# Allegro board MAINBOARD_02_20181023.brd
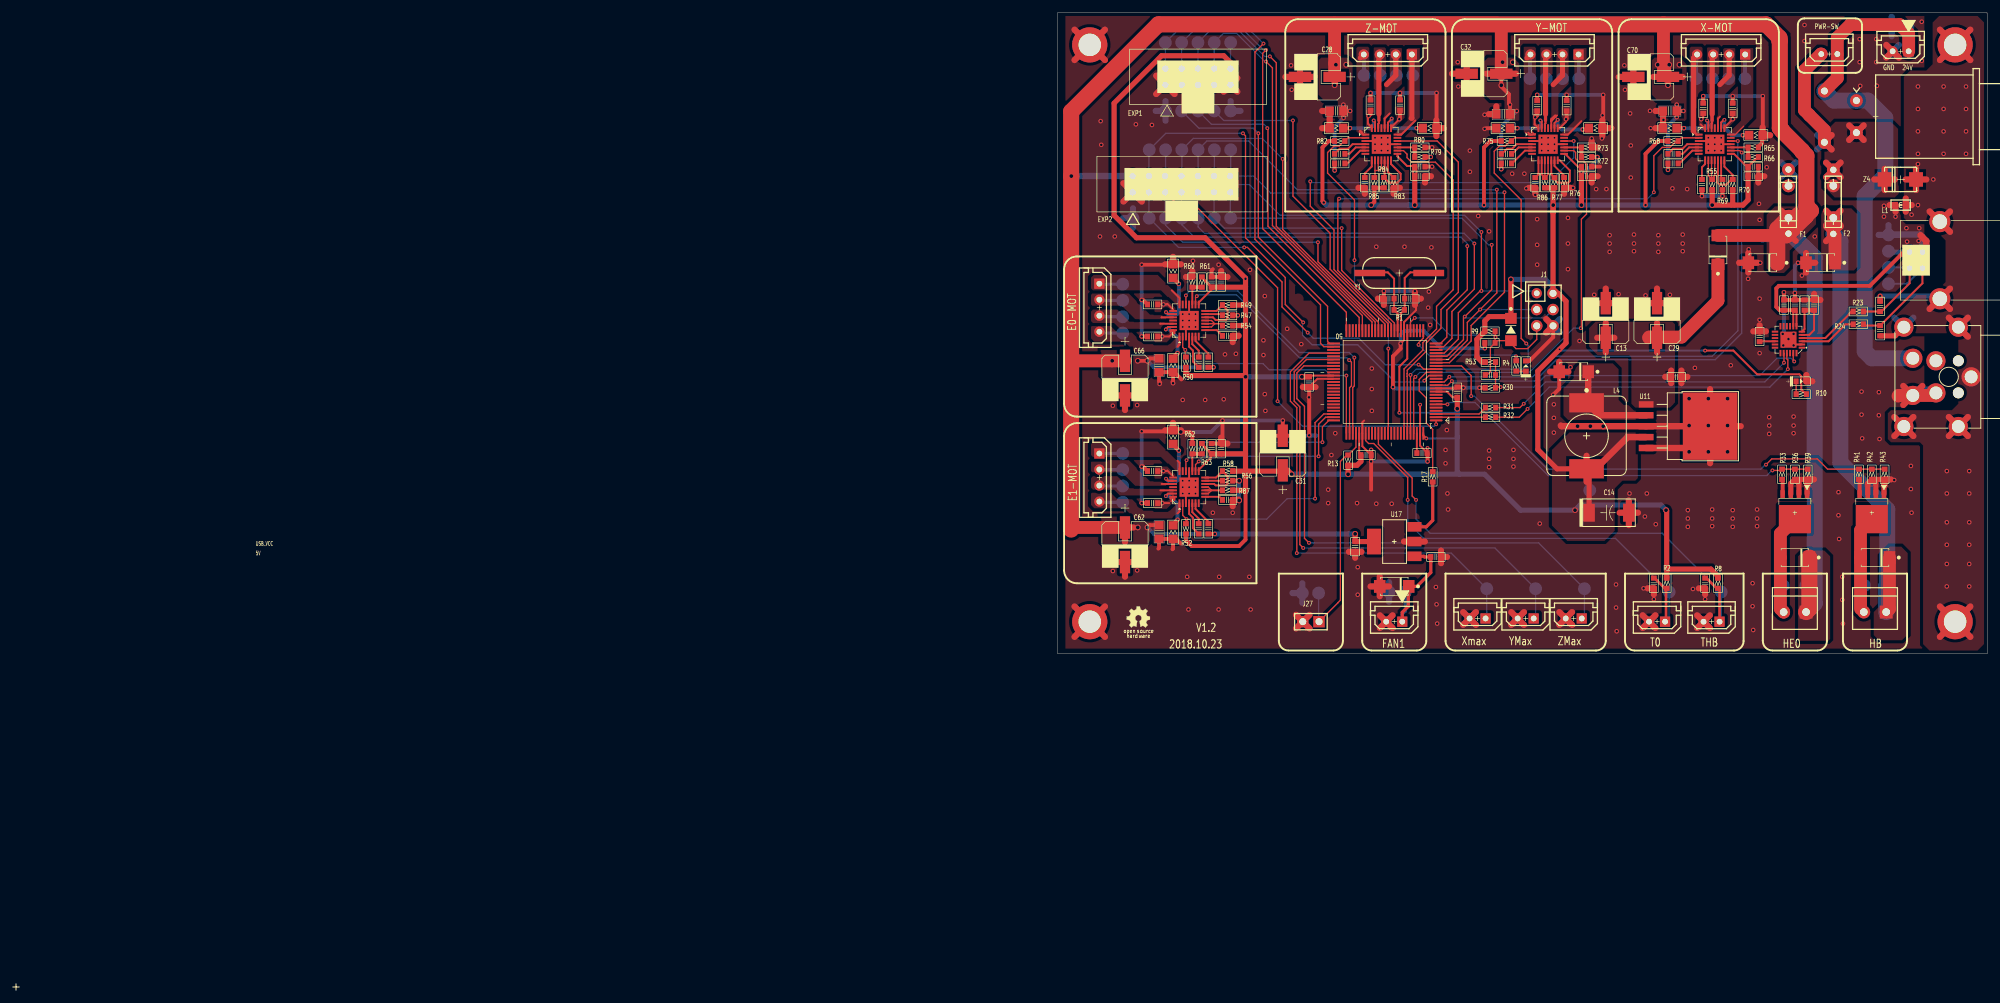
[diagram p0: board, top side]
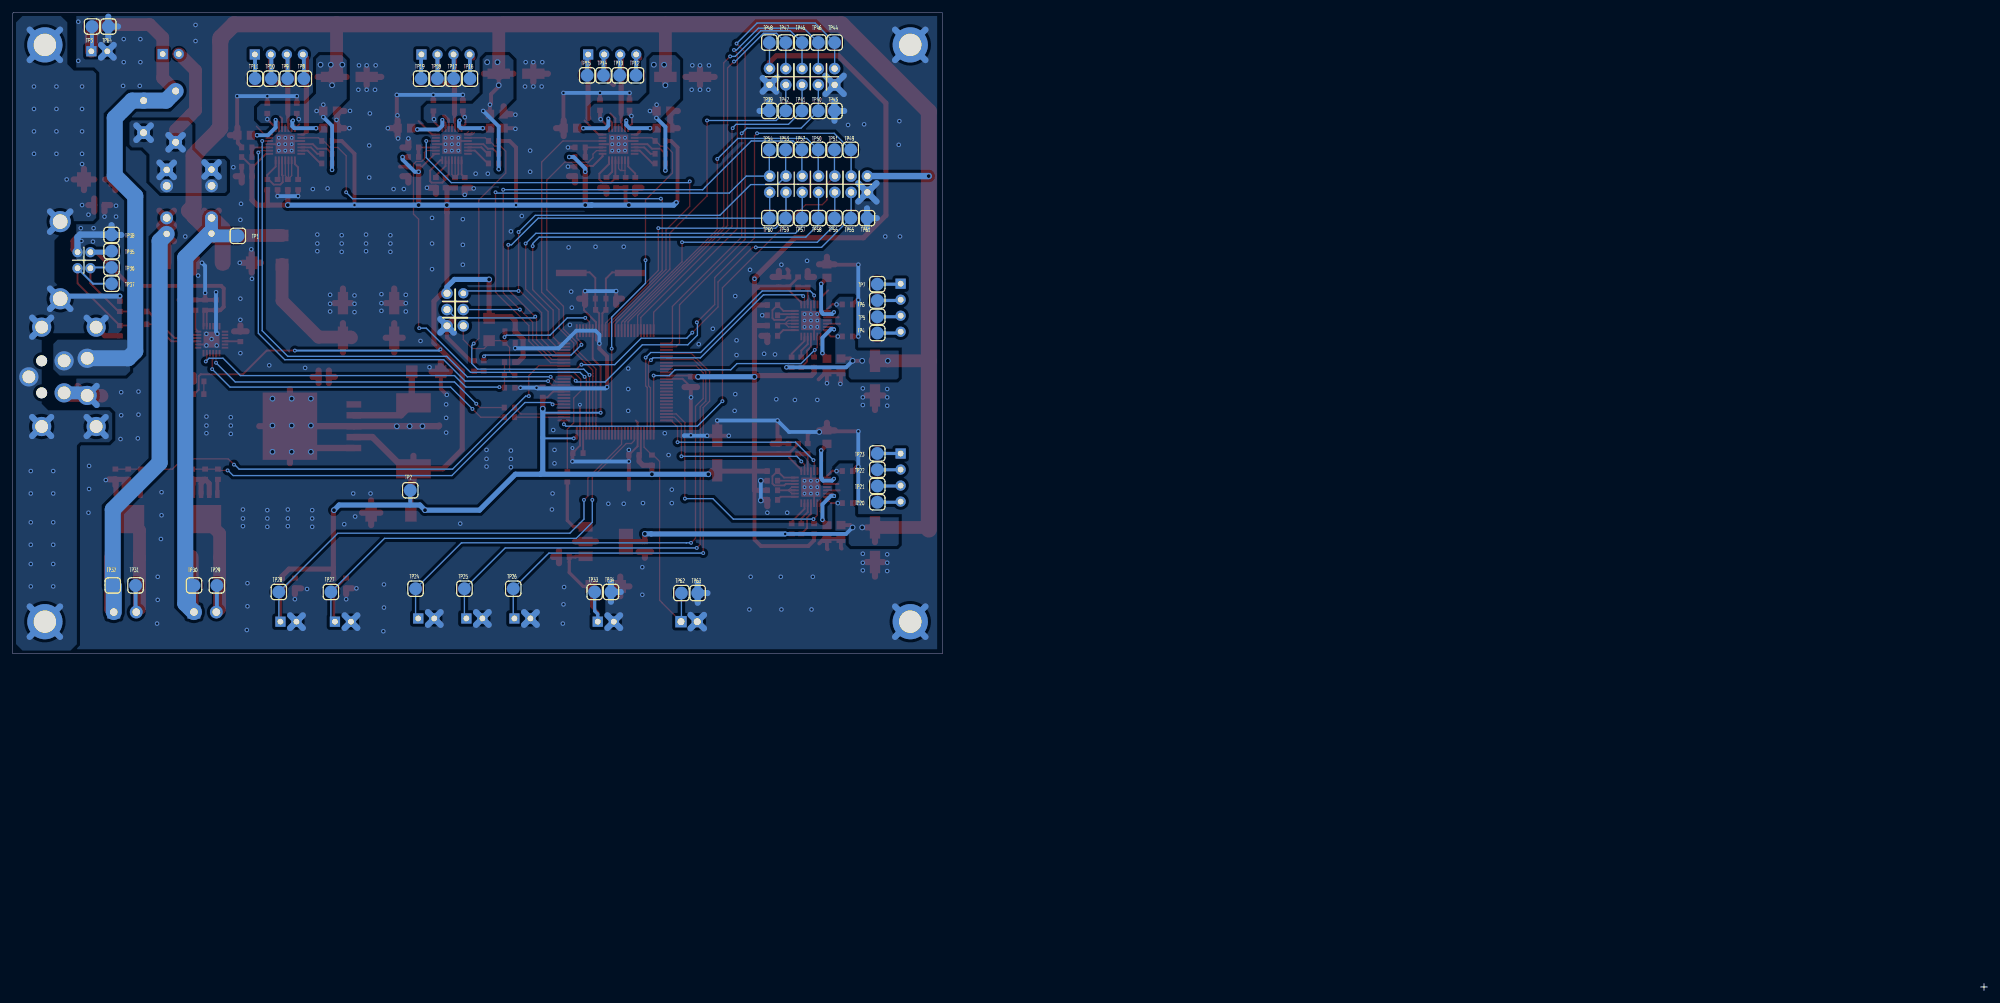
[diagram p1: board, bottom side, seen from below]

Outline 308 x 152.5 mm; copper layers: TOP, BOTTOM. Coordinates in mm from the lower left corner of the outline.
Outline path: 0,0.5 0.5,0.5 ; 0.5,0.5 0.5,1 ; 0.5,0.5 0.5,0 ; 0.5,0.5 1,0.5 ; 308,152.5 163,152.5 163,52.5 308,52.5 308,152.4 307.9,152.5

## Design rules (mm)
constraint set DEFAULT: 

## Placement (name value [footprint] x y rotation side)
BC1  100nF  [CCHIP1608]  225.33 93.3 90 top
BC2  100nF  [CCHIP1608]  219.83 83.8 0 top
BC3  100nF  [CCHIP1608]  202.23 94.9 270 top
BC4  100nF  [CCHIP1608]  211.1 83.5 0 top
BC6  100nF  [CCHIP1608]  259.5 95.7 0 top
BC11  100nF  [CCHIP1608]  187 110.49 90 top
BC12  100nF  [CCHIP1608]  187 84.49 90 top
BC13  100nF  [CCHIP1608]  271.5 128.5 0 top
BC14  100nF  [CCHIP1608]  245.5 128.5 0 top
BC15  100nF  [CCHIP1608]  219.5 128.5 0 top
C1  18pF  [CCHIP1608]  217.93 107.9 0 top
C2  18pF  [CCHIP1608]  214.68 107.9 180 top
C3  1uF  [CCHIP1608]  256 63.5 270 top
C6  1uF  [CCHIP1608]  264 63.5 270 top
C7  18pF  [CCHIP1608]  230.43 101 180 top
C8  220nF  [CCHIP1608]  209.4 69.2 270 top
C9  1uF  [CCHIP1608]  276.3 106.9 90 top
C10  1uF  [CCHIP1608]  272.5 102 90 top
C11  1nF  [CCHIP1608]  222 67.6 0 top
C12  1uF  [CCHIP1608]  230.5 96 180 top
C13  100uF/35V  [SAMYOUNG-F60]  248.5 104.5 270 top
C14  330uF/10V (Tantal E case)  [TCHIP7343]  249 74.5 0 top
C15  100nF  [CCHIP1608]  278 106.9 90 top
C19  100nF  [CCHIP1608]  281 106.9 90 top
C21  100nF  [CCHIP1608]  279.5 106.9 90 top
C28  100uF/35V/AL  [SAMYOUNG-F60]  203.5 142.5 0 top
C29  100uF/35V/AL  [SAMYOUNG-F60]  256.5 104.5 270 top
C31  220uF/6.34V/AL  [SAMYOUNG-F60]  198.11 83.81 270 top
C32  100uF/35V/AL  [SAMYOUNG-F60]  229.5 143 0 top
C33  100nF  [CCHIP1608]  185 97.99 270 top
C34  1uF  [CCHIP1608]  188.5 110.49 90 top
C35  100nF  [CCHIP1608]  186.5 97.99 90 top
C36  1uF  [CCHIP1608]  188.5 84.49 90 top
C37  100nF  [CCHIP1608]  186.5 71.99 90 top
C38  220nF  [CCHIP1608]  189.5 102.1 0 top
C39  100nF  [CCHIP1608]  185 71.99 270 top
C40  220nF  [CCHIP1608]  189.5 76.5 0 top
C41  1uF  [CCHIP1608]  271.5 127 0 top
C42  100nF  [CCHIP1608]  259 129 0 top
C43  100nF  [CCHIP1608]  259 130.5 180 top
C44  220nF  [CCHIP1608]  263.5 125.7 270 top
C45  1uF  [CCHIP1608]  245.5 127 0 top
C46  100nF  [CCHIP1608]  233 129 0 top
C47  100nF  [CCHIP1608]  233 130.5 180 top
C48  220nF  [CCHIP1608]  237.5 126 270 top
C49  1uF  [CCHIP1608]  219.5 127 0 top
C50  100nF  [CCHIP1608]  207 129 0 top
C51  100nF  [CCHIP1608]  207 130.5 180 top
C52  220nF  [CCHIP1608]  210.9 126 270 top
C53  4.7uF  [CCHIP2012]  206.5 136.5 180 top
C54  0.1uF  [CCHIP1608]  211.8 138.1 90 top
C55  0.1uF  [CCHIP1608]  216.4 138.1 90 top
C56  4.7uF  [CCHIP2012]  232.5 136 180 top
C57  0.1uF  [CCHIP1608]  237.8 138 90 top
C58  0.1uF  [CCHIP1608]  242.4 138 90 top
C59  4.7uF  [CCHIP2012]  179.5 71.5 270 top
C60  0.1uF  [CCHIP1608]  177.8 81 180 top
C61  0.1uF  [CCHIP1608]  177.8 76 180 top
C62  100uF/35V/AL  [SAMYOUNG-F60]  173.5 69.5 90 top
C63  4.7uF/2012  [CCHIP2012]  179.5 97.5 270 top
C64  0.1uF  [CCHIP1608]  177.8 102 180 top
C65  0.1uF  [CCHIP1608]  177.8 107 180 top
C66  100uF/35V/AL  [SAMYOUNG-F60]  173.5 95.5 90 top
C67  4.7uF  [CCHIP2012]  258.5 136.5 180 top
C68  0.1uF  [CCHIP1608]  263.7 137.6 90 top
C69  0.1uF  [CCHIP1608]  268.3 137.6 90 top
C70  100uF/35V/AL  [SAMYOUNG-F60]  255.5 142.5 0 top
CN2  5267-02P  [5267-02]  256.5 57.5 180 top
CN3  -  [5267-04]  169.5 106.49 270 top
CN4  -  [5267-04]  169.5 79.99 270 top
CN6  5267-02P  [5267-02]  265 57.5 180 top
CN7  -  [5267-04]  266.5 146 180 top
CN8  -  [5267-04]  240.5 146 180 top
CN9  -  [5267-04]  214.5 146 180 top
CN11  5267-02P  [5267-02]  243.5 58 180 top
CN12  5267-02P  [5267-02]  236 58 180 top
CN13  5267-02P  [5267-02]  228.5 58 180 top
CN16  5267-02P  [5267-02]  283.37 146.07 180 top
CN17  BR350  [TERMINAL_350P_2P_BR350C]  278 59 180 top
CN18  5267-02P  [5267-02]  215.5 57.5 180 top
CN19  BR350  [TERMINAL_350P_2P_BR350C]  290.5 59 180 top
D1  SS34  [LL5819]  266 115.5 270 top
D2  SS34  [LL5819]  273 113.5 0 top
D3  B560C-13-F  [LL5819]  243.5 96.5 0 top
D4  SS34  [LL5819]  282 113.5 0 top
D6  LL4148  [PHM_1N4935]  233.7 103.1 90 top
D9  SS34  [LL5819]  215.5 63 0 top
D10  SS34  [LL5819]  278 67.5 0 top
D12  SS34  [LL5819]  290.5 67.5 0 top
EXP1  HEADER_2x5_B  [HEADER2X5_B]  179.8 141.26 0 top
EXP2  HEADER_2x7_B  [HEADER2X7_B]  174.69 124.48 0 top
F1  JUMPER  [FUSE050]  277 123 270 top
F2  JUMPER  [FUSE050]  284 123 270 top
F3  JUMPER  [FUSE100]  277 123.05 270 top
F4  JUMPER  [FUSE100]  284 123 270 top
J1  HEADER_2x3_M  [HEADER2X3]  239 106.2 0 top
J25  Rocker_SW_KCD1-104 ANGLE  [SW_KCD1-104-1]  290.6 136.3 270 top
J26  HEADER 2  [5267-02]  294.5 146.5 180 top
J27  HEADER 2  [HEADER1X2]  202.5 57.5 180 top
JR1  2MJ-3432-007  [DIN4PS_2MJ-3432-007]  311 95.7 270 top
L1  FB  [L1608]  294.5 122.5 180 top
L4  47uH/ MSS1210-473ME  [L_123X60H_220UH]  245.5 86.5 270 top
LED1  LEDG-SMD  [LED1608]  236.03 97.4 90 top
LED2  LEDG-SMD  [LED1608]  279 95 0 top
NOREF  -  []  308 52.5 90 top
NOREF#2  -  []  163 152.5 0 top
NOREF#3  -  []  168 57.5 0 top
NOREF#4  -  []  303 147.5 90 top
NOREF#5  -  []  303 147.5 0 top
NOREF#6  -  []  308 113.9 90 top
NOREF#7  -  []  308 95.7 90 top
NOREF#8  -  []  308 62.5 90 top
NOREF#9  -  []  168 57.5 90 top
NOREF#10  -  []  174.79 59.16 0 top
NOREF#11  -  []  294.5 113.9 0 top
PAD5  TP2  [HOLE350X550]  303 147.5 0 top
PAD6  TP2  [HOLE350X550]  168 147.5 0 top
PAD7  TP2  [HOLE350X550]  303 57.5 0 top
PAD8  TP2  [HOLE350X550]  168 57.5 0 top
Q3  PSMN7R0-60YS  [SOT669]  278 74.5 180 top
Q5  PSMN7R0-60YS  [SOT669]  290 74.5 180 top
R1  1M  [RCHIP1608]  216.28 106.15 180 top
R2  4.7k  [RCHIP1608]  258 63.5 90 top
R4  1k  [RCHIP1608]  234.53 97.4 90 top
R8  4.7k  [RCHIP1608]  266 63.5 90 top
R9  10k  [RCHIP1608]  230.43 102.8 180 top
R10  1k  [RCHIP1608]  279 93 0 top
R13  10k  [RCHIP1608]  208.3 82.7 270 top
R17  1k  [RCHIP1608]  221.5 80.1 90 top
R23  22  [RCHIP1608]  287.9 105.9 0 top
R24  22  [RCHIP1608]  287.9 103.9 0 top
R30  1k  [RCHIP1608]  230.5 94 180 top
R31  1k  [RCHIP1608]  230.53 90.9 180 top
R32  1k  [RCHIP1608]  230.53 89.4 180 top
R33  22  [RCHIP1608]  276 80.5 90 top
R36  NM-1k  [RCHIP1608]  278 80.5 90 top
R39  100k  [RCHIP1608]  280 80.5 90 top
R41  22  [RCHIP1608]  288 80.5 90 top
R42  NM-1k  [RCHIP1608]  290 80.5 90 top
R43  100k  [RCHIP1608]  292 80.5 90 top
R47  10k  [RCHIP1608]  189.5 105.3 180 top
R48  0.2/2012  [RCHIP2012]  181 112.19 270 top
R49  10k  [RCHIP1608]  189.5 106.9 180 top
R50  10k  [RCHIP1608]  183 97.99 270 top
R51  0.2/2012  [RCHIP2012]  181 97.49 90 top
R52  10k  [RCHIP1608]  183 71.99 270 top
R53  NM-1k  [RCHIP1608]  230.5 98 0 top
R54  10k  [RCHIP1608]  189.5 103.7 0 top
R55  10k  [RCHIP1608]  265.1 125.7 270 top
R56  10k  [RCHIP1608]  189.5 79.49 180 top
R57  0.2/2012  [RCHIP2012]  181 86.29 270 top
R58  10k  [RCHIP1608]  189.5 80.99 180 top
R59  0.2/2012  [RCHIP2012]  181 71.49 90 top
R60  680  [RCHIP1608]  184 110.49 270 top
R61  10k  [RCHIP1608]  185.5 110.49 90 top
R62  680  [RCHIP1608]  184 84.49 270 top
R63  10k  [RCHIP1608]  185.5 84.49 90 top
R64  0.2/2012  [RCHIP2012]  271.9 133.4 180 top
R65  3K 1%  [RCHIP1608]  271.5 131.5 180 top
R66  10k  [RCHIP1608]  271.5 130 0 top
R67  0.2/2012  [RCHIP2012]  258.5 134.5 0 top
R68  10k  [RCHIP1608]  259 132.5 180 top
R69  10k  [RCHIP1608]  266.7 125.7 90 top
R70  10k  [RCHIP1608]  268.3 125.7 90 top
R71  0.2/2012  [RCHIP2012]  246.9 134.5 180 top
R72  10k  [RCHIP1608]  245.5 130 0 top
R73  3K 1%  [RCHIP1608]  245.5 131.5 180 top
R74  0.2/2012  [RCHIP2012]  232.5 134.5 0 top
R75  10k  [RCHIP1608]  233 132.5 180 top
R76  10k  [RCHIP1608]  242 126 90 top
R77  100k  [RCHIP1608]  240.5 126 90 top
R78  0.2/2012  [RCHIP2012]  221 134.5 180 top
R79  10k  [RCHIP1608]  219.5 130 0 top
R80  3K 1%  [RCHIP1608]  219.5 131.5 180 top
R81  0.2/2012  [RCHIP2012]  206.5 134.5 0 top
R82  10k  [RCHIP1608]  207 132.5 180 top
R83  10k  [RCHIP1608]  215.4 126 90 top
R84  10k  [RCHIP1608]  213.9 126 90 top
R85  10k  [RCHIP1608]  212.4 126 270 top
R86  4.7k  [RCHIP1608]  239 126 270 top
R87  10k  [RCHIP1608]  189.5 78 0 top
TP1  SMD  [TP200]  272.9 117.7 180 bottom
TP2  SMD  [TP200]  246 78 180 bottom
TP3  SMD  [TP200]  295.65 150.36 180 bottom
TP4  SMD  [TP200]  173.14 102.54 180 bottom
TP5  SMD  [TP200]  173.14 105.08 180 bottom
TP6  SMD  [TP200]  173.14 107.62 180 bottom
TP7  SMD  [TP200]  173.14 110.16 180 bottom
TP8  SMD  [TP200]  262.6 142.23 180 bottom
TP9  SMD  [TP200]  265.14 142.23 180 bottom
TP10  SMD  [TP200]  267.68 142.23 180 bottom
TP11  SMD  [TP200]  270.22 142.23 180 bottom
TP12  SMD  [TP200]  210.78 142.74 180 bottom
TP13  SMD  [TP200]  213.32 142.74 180 bottom
TP14  SMD  [TP200]  215.86 142.74 180 bottom
TP15  SMD  [TP200]  218.4 142.74 180 bottom
TP16  SMD  [TP200]  236.69 142.23 180 bottom
TP17  SMD  [TP200]  239.23 142.23 180 bottom
TP18  SMD  [TP200]  241.77 142.23 180 bottom
TP19  SMD  [TP200]  244.31 142.23 180 bottom
TP20  SMD  [TP200]  173.14 76.13 180 bottom
TP21  SMD  [TP200]  173.14 78.67 180 bottom
TP22  SMD  [TP200]  173.14 81.21 180 bottom
TP23  SMD  [TP200]  173.14 83.75 180 bottom
TP24  SMD  [TP200]  245.17 62.64 180 bottom
TP25  SMD  [TP200]  237.55 62.64 180 bottom
TP26  SMD  [TP200]  229.93 62.64 180 bottom
TP27  SMD  [TP200]  258.38 62.14 180 bottom
TP28  SMD  [TP200]  266.51 62.14 180 bottom
TP29  SMD  [TP200]  276.17 63.15 180 bottom
TP30  SMD  [TP200]  279.72 63.15 180 bottom
TP31  SMD  [TP200]  288.85 63.15 180 bottom
TP32  SMD  [TP200]  292.41 63.15 180 bottom
TP33  SMD  [TP200]  217.23 62.14 180 bottom
TP34  SMD  [TP200]  214.69 62.14 180 bottom
TP35  SMD  [TP200]  292.6 115.31 180 bottom
TP36  SMD  [TP200]  292.6 112.77 180 bottom
TP37  SMD  [TP200]  292.6 110.23 180 bottom
TP38  SMD  [TP200]  292.6 117.85 180 bottom
TP39  SMD  [TP200]  189.98 137.19 180 bottom
TP40  SMD  [TP200]  182.34 137.19 180 bottom
TP41  SMD  [TP200]  184.9 137.19 180 bottom
TP42  SMD  [TP200]  187.42 137.19 180 bottom
TP43  SMD  [TP200]  179.82 137.19 180 bottom
TP44  SMD  [TP200]  179.8 147.86 180 bottom
TP45  SMD  [TP200]  184.88 147.86 180 bottom
TP46  SMD  [TP200]  182.34 147.86 180 bottom
TP47  SMD  [TP200]  187.42 147.86 180 bottom
TP48  SMD  [TP200]  189.98 147.86 180 bottom
TP49  SMD  [TP200]  177.28 131.13 90 bottom
TP50  SMD  [TP200]  182.36 131.13 90 bottom
TP51  SMD  [TP200]  179.82 131.13 90 bottom
TP52  SMD  [TP200]  184.9 131.13 90 bottom
TP53  SMD  [TP200]  187.44 131.13 90 bottom
TP54  SMD  [TP200]  189.98 131.13 90 bottom
TP55  SMD  [TP200]  177.28 120.46 90 bottom
TP56  SMD  [TP200]  179.82 120.46 90 bottom
TP57  SMD  [TP200]  184.9 120.46 90 bottom
TP58  SMD  [TP200]  182.36 120.46 90 bottom
TP59  SMD  [TP200]  187.44 120.46 90 bottom
TP60  SMD  [TP200]  189.98 120.46 90 bottom
TP61  SMD  [TP200]  174.74 120.46 180 bottom
TP62  SMD  [TP200]  203.7 61.97 180 bottom
TP63  SMD  [TP200]  201.16 61.97 180 bottom
TP64  SMD  [TP200]  293.11 150.36 180 bottom
U1  CP2104  [QFN050_400_24P]  277 101.5 180 top
U2  ATMeag2560-16AU  [TQ100]  214.03 94.9 180 top
U7  USB_CON  [USBDEV_A]  296.9 113.9 270 top
U11  LM2596SX-5.0  [LM2576-D2PAK]  254 88 270 top
U12  A4988  [QFN050_500_28P]  183.5 104.49 90 top
U13  A4988  [QFN050_500_28P]  183.5 78.49 90 top
U14  A4988  [QFN050_500_28P]  265.5 132 0 top
U15  A4988  [QFN050_500_28P]  239.5 132 0 top
U16  A4988  [QFN050_500_28P]  213.5 132 0 top
U17  INF-ITS4200S-ME-X-SOT223-4  [SOT223]  215.5 70 90 top
Y1  16MHz_ATS_SMD  [XTALSMD2]  216.28 111.9 0 top
Z1  INR  [CCHIP1608]  291.3 106.7 270 top
Z2  INR  [CCHIP1608]  291.3 102.9 90 top
Z4  SMBJ24A_TVS  [DO-214AA]  294.5 126.5 0 top

## Library data of the parts
BC1-BC4 BC6 BC11-BC15 C1-C3 C6-C12 C15 C19 C21 C33-C52 C54 C55 C57 C58 C60 C61 C64 C65 C68 C69 = CAPACITOR NON-POL: Tolerance: TOL*; User Part Number: PAR*
C13 C14 C28 C29 C31 C32 C62 C66 C70 = C
C53 C56 C59 C63 C67 = CAPACITOR NON-POL: User Part Number: PAR*; Tolerance: TOL*
CN2 CN6 CN11-CN13 CN16-CN19 = CON2_0
CN3 CN4 CN7-CN9 = CON4_0
D1-D4 D9 D10 D12 = 1N1184A: Tolerance: TOL*; User Part Number: PAR*
D6 = 1N1184A: User Part Number: PAR*; Tolerance: TOL*
EXP1 = HEADER 5X2_0
EXP2 = HEADER 7X2
F1-F4 = JUMPER
J1 = HEADER 3X2
J25 = HEADER 2X2_1: User Part Number: PAR*; Tolerance: TOL*
J26 J27 = HEADER 2
JR1 = CONN CIR 5-R_1
L1 = l
L4 = l: Tolerance: TOL*; User Part Number: PAR*
LED1 LED2 = LED
PAD5-PAD8 = TP2_0
Q3 Q5 = IRF540N/TO_0: User Part Number: PAR*; Tolerance: TOL*
R1 R2 R4 R8-R10 R13 R17 R23 R24 R30-R33 R36 R39 R41-R43 R47 R49 R50 R52-R56 R58 R60-R63 R65 R66 R68-R70 R72 R73 R75-R77 R79 R80 R82-R87 = R_2: User Part Number: PAR*; Tolerance: TOL*
R48 R51 R57 R59 R64 R67 R71 R74 R78 R81 = R_2: Tolerance: TOL*; User Part Number: PAR*
TP1-TP64 = TEST POINT
U1 = CP2105_0
U2 = ATMeag2560a1_0: User Part Number: PAR*; Tolerance: TOL*
U7 = USB_CON: User Part Number: *
U11 = LM2575_0
U12-U16 = A4988
U17 = INF-ITS4200S-ME-X-SOT223-4
Y1 = CRYSTAL
Z1 Z2 = INR: Tolerance: TOL*; User Part Number: PAR*
Z4 = P6SMB9_0.1CA

## Footprints (pads in the part's own frame, mm; a bottom-side part is the same pattern mirrored in y, then rotated)
5267-02
  rect 1.6x1.6 hole 0.9: 1(-1.25,0)
  round 1.6 hole 0.9: 2(1.25,0)
5267-04
  rect 1.6x1.6 hole 0.9: 1(-3.75,0)
  round 1.6 hole 0.9: 2(-1.25,0) 3(1.25,0) 4(3.75,0)
CCHIP1608
  rect 0.8x0.9 smd: 1(-0.8,0) 2(0.8,0)
CCHIP2012
  rect 1.3x1.4 smd: 1(-1.067,-0.686) 2(1.067,-0.686)
DIN4PS_2MJ-3432-007
  round 1.7 hole 1.7 unplated: (-2.5,-7.5) (2.5,-7.5)
  round 3 hole 2: 1(2.9,-14.6) 2(-2.9,-14.6) 3(2.5,-11) 4(-2.5,-11) 5(0,-5.5) 6(7.75,-16) 7(-7.75,-16) 8(7.75,-7.5) 9(-7.75,-7.5)
DO-214AA
  rect 2.16x2.26 smd: 1(-2.5,0) 2(2.4,0)
FUSE050
  round 2 hole 1.2: 1(-2.5,0) 2(2.5,0)
FUSE100
  round 2 hole 1: 1(-5,0) 2(5,0)
HEADER1X2
  rect 1.778x1.778 hole 1.1: 1(-1.27,0)
  round 1.778 hole 1.1: 2(1.27,0)
HEADER2X3
  round 1.6 hole 0.9: 1(-1.27,2.54)
  round 1.8 hole 1.1: 2(1.27,2.54) 3(-1.27,0) 4(1.27,0) 5(-1.27,-2.54) 6(1.27,-2.54)
HEADER2X5_B
  rect 1.8x1.8 hole 1: 1(0,0)
  round 1.8 hole 1: 2(0,2.54) 3(2.54,0) 4(2.54,2.54) 5(5.08,0) 6(5.08,2.54) 7(7.62,0) 8(7.62,2.54) 9(10.16,0) 10(10.16,2.54)
HEADER2X7_B
  rect 1.8x1.8 hole 1: 1(0,0)
  round 1.8 hole 1: 2(0,2.54) 3(2.54,0) 4(2.54,2.54) 5(5.08,0) 6(5.08,2.54) 7(7.62,0) 8(7.62,2.54) 9(10.16,0) 10(10.16,2.54) 11(12.7,0) 12(12.7,2.54) 13(15.24,0) 14(15.24,2.54)
HOLE350X550
  round 5.5 hole 3.5: 1(0,0)
L1608
  rect 0.8x1 smd: 1(-0.8,0) 2(0.8,0)
L_123X60H_220UH
  rect 3x5.4 smd: 1(-5.15,0) 2(5.15,0)
LED1608
  rect 0.8x0.9 smd: 1(-0.813,0) 2(0.787,0)
LL5819
  rect 1.8x2 smd: 1(-2.261,0) 2(2.261,0)
LM2576-D2PAK
  rect 1x2.3 smd: 1(-3.404,0.8) 2(-1.702,0.8) 3(0,0.8) 4(1.702,0.8) 5(3.404,0.8)
  rect 10.5x8.5 smd: 6(0,10.775)
PHM_1N4935
  rect 1.702x1.803 smd: 1(-1.753,0) 2(1.727,0)
QFN050_400_24P
  rect 1x0.3 smd: 1(-2.1,1.25) 2(-2.1,0.75) 3(-2.1,0.25) 4(-2.1,-0.25) 5(-2.1,-0.75) 6(-2.1,-1.25) 13(2.1,-1.25) 14(2.1,-0.75) 15(2.1,-0.25) 16(2.1,0.25) 17(2.1,0.75) 18(2.1,1.25)
  rect 0.3x1 smd: 7(-1.25,-2.1) 8(-0.75,-2.1) 9(-0.25,-2.1) 10(0.25,-2.1) 11(0.75,-2.1) 12(1.25,-2.1) 19(1.25,2.1) 20(0.75,2.1) 21(0.25,2.1) 22(-0.25,2.1) 23(-0.75,2.1) 24(-1.25,2.1)
  rect 2.5x2.5 smd: 25(0,0)
QFN050_500_28P
  rect 1.2x0.3 smd: 1(-2.5,1.5) 2(-2.5,1) 3(-2.5,0.5) 4(-2.5,0) 5(-2.5,-0.5) 6(-2.5,-1) 7(-2.5,-1.5) 15(2.5,-1.5) 16(2.5,-1) 17(2.5,-0.5) 18(2.5,0) 19(2.5,0.5) 20(2.5,1) 21(2.5,1.5)
  rect 0.3x1.2 smd: 8(-1.5,-2.5) 9(-1,-2.5) 10(-0.5,-2.5) 11(0,-2.5) 12(0.5,-2.5) 13(1,-2.5) 14(1.5,-2.5) 22(1.5,2.5) 23(1,2.5) 24(0.5,2.5) 25(0,2.5) 26(-0.5,2.5) 27(-1,2.5) 28(-1.5,2.5)
  rect 3x3 smd: 29(0,0)
RCHIP1608
  rect 0.8x0.9 smd: 1(-0.8,0) 2(0.8,0)
RCHIP2012
  rect 1.3x1.4 smd: 1(-1.067,0) 2(1.041,0)
SAMYOUNG-F60
  rect 3.5x1.6 smd: 1(2.7,0) 2(-2.7,0)
SOT223
  rect 1.5x2.2 smd: 1(-2.3,-3.15) 2(0,-3.15) 3(2.3,-3.15)
  rect 4x2.2 smd: 4(0,3.15)
SOT669
  rect 0.7x1.2 smd: 1(-1.905,-2.9) 2(-0.635,-2.9) 3(0.635,-2.9) 4(1.905,-2.9)
  rect 5x4.4 smd: 5(0,1)
SW_KCD1-104-1
  round 2 hole 1.1: 1(-2.5,-3) 2(-4,-8) 3(4,-8) 4(2.5,-3)
TCHIP7343
  rect 1.8x2.8 smd: 1(-3.1,0) 2(3.1,0)
TERMINAL_350P_2P_BR350C
  rect 2x2 hole 1.2: 1(-1.75,0)
  round 2 hole 1.2: 2(1.75,0)
TP200
  round 2 smd: 1(0,0)
TQ100
  oval 2.007x0.305 smd: 1(-8,6)
  rect 2.007x0.305 smd: 2(-8,5.5) 3(-8,5) 4(-8,4.5) 5(-8,4) 6(-8,3.5) 7(-8,3) 8(-8,2.5) 9(-8,2) 10(-8,1.5) 11(-8,1) 12(-8,0.5) 13(-8,0) 14(-8,-0.5) 15(-8,-1) 16(-8,-1.5) 17(-8,-2) 18(-8,-2.5) 19(-8,-3) 20(-8,-3.5) 21(-8,-4) 22(-8,-4.5) 23(-8,-5) 24(-8,-5.5) 25(-8,-6) 51(8,-6) 52(8,-5.5) 53(8,-5) 54(8,-4.5) 55(8,-4) 56(8,-3.5) 57(8,-3) 58(8,-2.5) 59(8,-2) 60(8,-1.5) 61(8,-1) 62(8,-0.5) 63(8,0) 64(8,0.5) 65(8,1) 66(8,1.5) 67(8,2) 68(8,2.5) 69(8,3) 70(8,3.5) 71(8,4) 72(8,4.5) 73(8,5) 74(8,5.5) 75(8,6)
  rect 0.305x2.007 smd: 26(-6,-8) 27(-5.5,-8) 28(-5,-8) 29(-4.5,-8) 30(-4,-8) 31(-3.5,-8) 32(-3,-8) 33(-2.5,-8) 34(-2,-8) 35(-1.5,-8) 36(-1,-8) 37(-0.5,-8) 38(0,-8) 39(0.5,-8) 40(1,-8) 41(1.5,-8) 42(2,-8) 43(2.5,-8) 44(3,-8) 45(3.5,-8) 46(4,-8) 47(4.5,-8) 48(5,-8) 49(5.5,-8) 50(6,-8) 76(6,8) 77(5.5,8) 78(5,8) 79(4.5,8) 80(4,8) 81(3.5,8) 82(3,8) 83(2.5,8) 84(2,8) 85(1.5,8) 86(1,8) 87(0.5,8) 88(0,8) 89(-0.5,8) 90(-1,8) 91(-1.5,8) 92(-2,8) 93(-2.5,8) 94(-3,8) 95(-3.5,8) 96(-4,8) 97(-4.5,8) 98(-5,8) 99(-5.5,8) 100(-6,8)
USBDEV_A
  round 1.6 hole 0.9: 1(-1.25,-1) 2(1.25,-1) 3(1.25,1) 4(-1.25,1)
  round 3.302 hole 2.286: 5(-6.02,3.71) 6(6.02,3.71)
XTALSMD2
  rect 4.8x1 smd: 1(-4.6,0) 2(4.6,0)

## Nets
24V: C8.1 C28.1 C32.1 C35.1 C37.1 C42.1 C46.1 C50.1 C53.1 C54.1 C55.1 C56.1 C57.1 C58.1 C59.1 C60.1 C61.1 C62.1 C63.1 C64.1 C65.1 C66.1 C67.1 C68.1 C69.1 C70.1 CN17.1 D1.1 D2.2(C) D10.2(C) EXP2.2 F1.2(P2) F3.2(P2) TP1.1 TP30.1 U12.22 U12.28 U13.22 U13.28 U14.22 U14.28 U15.22 U15.28 U16.22 U16.28 U17.4(VS)
24V_IN: CN16.1 J25.1 J25.2 J26.1 JR1.2 JR1.4 TP3.1
24V_OUT: CN16.2 F1.1 F2.1 F3.1 F4.1 J25.3 J25.4 Z4.1
+5V: BC1.1 BC3.1 BC4.1 BC11.1 BC12.1 BC13.1 BC14.1 BC15.1 C14.1 C31.1 C34.1 C36.1 C41.1 C45.1 C49.1 D6.2(C) EXP1.10 J1.2 L4.2 R2.2 R8.2 R9.2 R10.2 R13.2 R49.1 R50.2 R52.2 R53.1 R54.2 R55.2 R58.1 R61.2 R63.2 R66.2 R68.2 R70.1 R72.2 R75.2 R77.1 R79.2 R82.2 R84.1 R85.2 R86.2 R87.2 TP2.1 TP48.1 U2.10 U2.31 U2.61 U2.80 U2.100 U11.4 U12.15 U13.15 U14.15 U15.15 U16.15
GND: BC1.2 BC2.2 BC3.2 BC4.2 BC6.2 BC11.2 BC12.2 BC13.2 BC14.2 BC15.2 C1.2 C2.2 C3.2 C6.2 C7.2 C8.2 C9.2 C10.2 C11.2 C13.2 C14.2 C15.2 C19.2 C21.2 C28.2 C29.2 C31.2 C32.2 C34.2 C36.2 C38.2 C40.2 C41.2 C44.2 C45.2 C48.2 C49.2 C52.2 C53.2 C54.2 C55.2 C56.2 C57.2 C58.2 C59.2 C60.2 C61.2 C62.2 C63.2 C64.2 C65.2 C66.2 C67.2 C68.2 C69.2 C70.2 CN2.2 CN6.2 CN11.2 CN12.2 CN13.2 CN18.2 D2.1 D3.1 D4.1 D9.1 EXP1.1 EXP1.9 EXP2.1 J1.6 J26.2 J27.2 JR1.1 JR1.3 L1.2 LED1.2(CATHODE) LED2.2(CATHODE) PAD6.1(A) PAD8.1(A) Q3.1 Q3.2 Q3.3(S3) Q5.1 Q5.2 Q5.3(S3) R30.2 R36.1 R39.1 R42.1 R43.1 R47.1 R48.1 R51.1 R56.1 R57.1 R59.1 R60.1 R62.1 R64.1 R65.1 R67.1 R69.1 R71.1 R73.1 R74.1 R76.1 R78.1 R80.1 R81.1 R83.1 TP34.1 TP38.1 TP39.1 TP43.1 TP61.1 TP63.1 TP64.1 U1.2 U1.25 U2.11 U2.32 U2.62 U2.81 U2.99 U7.4 U11.3 U11.5 U11.6 U12.3 U12.18 U12.29 U13.3 U13.18 U13.29 U14.3 U14.18 U14.29 U15.3 U15.18 U15.29 U16.3 U16.18 U16.29 U17.2
VBUS: C9.1 C15.1 TP35.1 U1.7 U1.8 U7.1(VBUS)
VDD3V3: C19.1 C21.1 U1.5 U1.6
VIN_HB: CN19.1 D4.2(C) D12.2(C) F2.2(P2) F4.2(P2) TP32.1
1A_1: CN3.2 TP6.1 U12.24
1A_2: CN4.2 TP22.1 U13.24
1A_3: CN7.2 TP10.1 U14.24
1A_4: CN8.2 TP18.1 U15.24
1A_5: CN9.2 TP14.1 U16.24
1B_1: CN3.1 TP7.1 U12.21
1B_2: CN4.1 TP23.1 U13.21
1B_3: CN7.1 TP11.1 U14.21
1B_4: CN8.1 TP19.1 U15.21
1B_5: CN9.1 TP15.1 U16.21
2A_1: CN3.3 TP5.1 U12.26
2A_2: CN4.3 TP21.1 U13.26
2A_3: CN7.3 TP9.1 U14.26
2A_4: CN8.3 TP17.1 U15.26
2A_5: CN9.3 TP13.1 U16.26
2B_1: CN3.4 TP4.1 U12.1
2B_2: CN4.4 TP20.1 U13.1
2B_3: CN7.4 TP8.1 U14.1
2B_4: CN8.4 TP16.1 U15.1
2B_5: CN9.4 TP12.1 U16.1
AREF: BC2.1 U2.98
BEEPER: EXP2.5 TP56.1 U2.40
BTN_ENC: EXP2.8 TP50.1 U2.41
CP_RXD: R31.1 U1.20
CP_TXD: R32.1 U1.21
CTS_SCI: U1.18
D+: R24.1 U1.3
D-: R23.1 U1.4
DTR: C12.1 R30.1 R53.2 U1.23
E0-DIR: U2.78 U12.19
E0-EN: R50.1 U2.76 U12.2
E0-STEP: U2.77 U12.16
E1-DIR: U2.75 U13.19
E1-EN: R52.1 U2.73 U13.2
E1-STEP: U2.74 U13.16
FAN_1: R17.2 U2.16
FG: JR1.5 JR1.6 JR1.7 JR1.8 JR1.9 L1.1 PAD5.1(A) PAD7.1(A) U7.5 U7.6 Z1.1 Z2.1 Z4.2(A2)
HB: R41.2 R42.2 R43.2 U2.18
HE_0: R33.2 R36.2 R39.2 U2.6
LCD_D4: EXP1.5 TP41.1 U2.46
LCD_D5: EXP1.4 TP46.1 U2.50
LCD_D6: EXP1.3 TP40.1 U2.51
LCD_D7: EXP1.2 TP44.1 U2.52
LCD_ENA: EXP1.6 TP45.1 U2.42
LCD_RS: EXP1.8 TP47.1 U2.45
LCD_RW: EXP1.7 TP42.1 U2.38
LED_B: EXP2.6 TP51.1 U2.1
LED_G: EXP2.3 TP55.1 U2.17
LED_R: EXP2.4 TP49.1 U2.15
PB1_(SCK): EXP2.10 J1.3 TP52.1 U2.20
PB2_(MOSI): EXP2.13 J1.4 TP60.1 U2.21
PB3_(MISO): EXP2.12 J1.1 TP53.1 U2.22
POT_1: EXP2.7 TP58.1 U2.25
POT_3: EXP2.9 TP57.1 U2.24
REF1: R60.2 R61.1 U12.17
REF2: R62.2 R63.1 U13.17
REF3: R65.2 R66.1 U14.17
REF4: R72.1 R73.2 U15.17
REF5: R79.1 R80.2 U16.17
RESET: C7.1 C12.2 D6.1 J1.5 R9.1 U2.30
RSENS1_1: R48.2 U12.23
RSENS1_2: R57.2 U13.23
RSENS1_3: R64.2 U14.23
RSENS1_4: R71.2 U15.23
RSENS1_5: R78.2 U16.23
RSENS2_1: R51.2 U12.27
RSENS2_2: R59.2 U13.27
RSENS2_3: R67.2 U14.27
RSENS2_4: R74.2 U15.27
RSENS2_5: R81.2 U16.27
SD_CSEL: EXP2.14 TP54.1 U2.19
SD_DET: EXP2.11 TP59.1 U2.35
SUS: U1.17
SW: D3.2(C) L4.1 U11.2
THERM0: C3.1 CN2.1 R2.1 TP27.1 U2.82
THERM4: C6.1 CN6.1 R8.1 TP28.1 U2.86
USB_RXD: R32.2 U2.2
USB_TXD: R31.2 U2.3
X-DIR: U2.13 U14.19
X-EN: R68.1 U2.36 U14.2
X-MAX: CN13.1 TP26.1 U2.54
X-STEP: U2.12 U14.16
XTAL1: C2.1 R1.2 U2.34 Y1.1
XTAL2: C1.1 R1.1 U2.33(XTAL2) Y1.2
Y-DIR: U2.37 U15.19
Y-EN: R75.1 U2.96 U15.2
Y-MAX: CN12.1 TP25.1 U2.56
Y-STEP: U2.97 U15.16
Z-DIR: U2.95 U16.19
Z-EN: R82.1 U2.89 U16.2
Z-MAX: CN11.1 TP24.1 U2.58
Z-STEP: U2.94 U16.16
N34393673: R4.2 U2.26
N34583637: Q3.4 R33.1
N34583639: CN17.2 D10.1 Q3.5 TP29.1
N34587062: CN19.2 D12.1 Q5.5 TP31.1
N34587066: Q5.4 R41.1
N34604694: R23.2 TP36.1 U7.2 Z1.2
N34604695: R24.2 TP37.1 U7.3 Z2.2
N35686122: C10.1 U1.16(VPP)
N35712687: C35.2 U12.6
N35712691: C33.1 U12.5
N35712779: C33.2 U12.4
N35712783: C38.1 U12.8(VREG)
N35712796: R54.1 U12.9 U12.10 U12.11
N35712802: R47.2 U12.13
N35712804: R49.2 U12.12 U12.14
N35724673: C37.2 U13.6
N35724693: C39.1 U13.5
N35724765: C40.1 U13.8(VREG)
N35724769: C39.2 U13.4
N35724784: R87.1 U13.9 U13.10 U13.11
N35724788: R58.2 U13.12 U13.14
N35724792: R56.2 U13.13
N35740530: C42.2 U14.6
N35740537: C43.1 U14.5
N35740608: C44.1 U14.8(VREG)
N35740623: C43.2 U14.4
N35740633: R69.2 U14.13
N35740635: R70.2 U14.12 U14.14
N35740639: R55.1 U14.9 U14.10 U14.11
N35744195: C47.1 U15.5
N35744199: C46.2 U15.6
N35744281: C47.2 U15.4
N35744286: C48.1 U15.8(VREG)
N35744296: R86.1 U15.9 U15.10 U15.11
N35744298: R77.2 U15.12 U15.14
N35744302: R76.2 U15.13
N35751824: C50.2 U16.6
N35751831: C51.1 U16.5
N35751910: C52.1 U16.8(VREG)
N35751915: C51.2 U16.4
N35751925: R83.2 U16.13
N35751927: R84.2 U16.12 U16.14
N35751931: R85.1 U16.9 U16.10 U16.11
N35801437: BC6.1 C13.1 C29.1 D1.2(C) U11.1(VIN)
N35873753: J27.1 R13.1 TP62.1 U2.79
N36056142: R17.1 U17.3
N36056990: C11.1 CN18.1 D9.2(C) TP33.1 U17.1
N344497780: LED1.1 R4.1
N344825870: LED2.1 R10.1

Pads without a net: U1 1 9 10 11 12 13 14 15 19 22 24; U2 4 5 7 8 9 14 23 27 28 29 39 43 44 47 48 49 53 55 57 59 60 63 64 65 66 67 68 69 70 71 72 83 84 85 87 88 90 91 92 93; U12 7 20 25; U13 7 20 25; U14 7 20 25; U15 7 20 25; U16 7 20 25

## Via types
v1: diameter 0.6, hole 0.3, TOP to BOTTOM, 133 vias
v2: diameter 0.711, hole 0.406, TOP to BOTTOM, 347 vias
v3: diameter 0.9, hole 0.6, TOP to BOTTOM, 45 vias

## Routing (per net, layer and track width the routed paths; a pad name or vN(x,y) marks a point on that pad's centre or on a via; arc(x,y) is an arc through that point)
24V: length 582.4
  TOP w0.2: C32.1 232.2,142.5 ; U13.22 181,80.2 ; 232.2,144.2 232.4,144.4
  TOP w0.3: v2(179.3,76) 180.4,76 ; C64.1 v2(179.3,102) 180.4,102 181,102.6 U12.28 ; 242.3,135.5 241.3,134.5 U15.22 ; 237.8,136.9 237.4,136.5 237.4,135.1 U15.28 ; U12.28 180.89,102.99 180.6,102.7 ; U12.28 181.01,102.99 181.2,102.8 181.2,102.5 ; 181,80.2 180.1,81.1 ; v2(263.4,135.9) 263.7,136.2 C68.1 ; 263.3,135.1 263.9,134.5 U14.28 ; U12.22 181,106.2 180.1,107.1 180,107 v2(179.5,107) C65.1 ; 180.6,76.7 180.89,76.99 U13.28 ; U13.28 181.01,76.99 181.2,76.8 181.2,76.5 ; U13.28 181,76.6 180.7,76.3 ; U14.22 267,134.6 v2(268.3,135.9) C69.1 ; C60.1 v2(179.5,81) 180,81 ; v2(211.5,136.4) 211.4,136.3 211.4,135.2 212,134.6 U16.28 ; U16.22 215,134.6 v2(216.3,135.9)
  TOP w0.6: C67.1 v2(259.57,138.17) ; C67.1 v2(260.61,137.19) ; C67.1 v2(259.57,136.23) ; v2(237.5,136.2) 237.8,136.5 C57.1 ; C58.1 242.4,136 v2(242.3,135.9) ; C46.1 v2(232.2,128.1) ; 233.57,136.23 C56.1 v2(233.57,138.17) 233.4,138.33 233.4,139.8 232.2,141 v3(232.2,141.2) 232.2,142.5 ; C42.1 v2(258.2,128) ; v2(216.3,135.9) 216.4,136 C55.1 ; C70.1 v3(258.2,141.2) ; C50.1 v2(206.2,127.9) ; C54.1 211.8,136.7 v2(211.5,136.4) ; v3(177,72.2) 177.37,72.57 C59.1 ; 206.2,144.6 v3(206.4,144.4) 206.4,141.4 v3(206.2,141.2) C28.1 ; v3(175.5,98.2) v3(177,98.2) 177.37,98.57 C63.1 ; C53.1 207.57,136.23 ; C53.1 v2(208.61,137.19) ; C53.1 v2(207.57,138.17) ; C37.1 v2(187.51,71.19) ; C35.1 v2(187.31,97.19)
  TOP w0.8: v3(209.4,71.2) C8.1 209.8,70 U17.4
  TOP w0.962: 275.87,119.18 F3.2 278.13,116.92 ; F1.2 278.13,121.63 ; F1.2 275.87,121.63 ; F1.2 278.13,119.37 ; C70.1 258.2,143.83 ; C70.1 260.48,142.5 ; C70.1 255.92,142.5 ; 174.83,72.2 C62.1 173.5,69.92 ; 234.48,143 C32.1 229.92,143
  TOP w2: 206.2,150.9 231.5,150.9 232.2,150.2 C32.1 ; 206.2,150.9 C28.1 ; 206.2,150.9 178.9,150.9 178.7,150.7 ; 165.1,98.2 v3(171.5,98.2) C66.1 ; C70.1 257.5,143.2 257.5,150.7 ; C62.1 165.43,72.2 165.1,71.87 ; D1.1 276.71,117.76
  TOP w2.5: 165.1,71.87 165.1,127 ; 279.7,120.83 279.37,120.5 F1.2 275.26,118.76 D2.2 ; 279.7,120.83 280.5,121.63 280.1,122.03 279.8,122.33 279.8,130.2 279.15,130.85 279.15,130.96 276,134.1 276,134.17 275.65,134.52 275.65,148.06 275.6,148.1 275.6,148.6 273.5,150.7 178.7,150.7 165.1,137.1 165.1,127 ; 279.7,120.83 279.7,120.75 F3.2 276.71,117.76 ; 165.1,127 v3(165.12,127.02) ; D10.2 280.26,59.51 CN17.1
  BOTTOM w0.6: v2(259.57,136.23) 258.2,134.87 v2(258.2,128) ; v2(234.61,137.19) 232.2,134.77 v2(232.2,128.1) ; v2(187.31,97.19) 178.01,97.19 v3(177,98.2) ; CN17.1 279.72,59.03 TP30.1 ; v3(177,72.2) 178.01,71.19 v2(187.51,71.19) ; v2(206.2,127.9) 206.2,134.7 v2(207.6,136.1)
  BOTTOM w0.8: v2(187.51,71.19) 208.41,71.19 208.42,71.2 v3(209.4,71.2)
  BOTTOM w1: EXP2.2 v3(165.12,127.02)
  BOTTOM w2: F1.2 F3.2 276.65,117.7 TP1.1
  BOTTOM w2.5: CN17.1 281.1,60.35 281.1,114.3 277.35,118.05 F3.2
  vias: v3(175.5,72.2) v3(208,144.4) v3(232.4,144.8) v3(234,144.8) v3(256.6,144.4) v3(258.4,144.4) v3(260,144.4)
24V_IN: length 85.3
  TOP w2: J26.1 295.75,149.25 294.34,150.66 286.66,150.66 284.62,148.62 CN16.1 284.62,142.32 J25.2
  BOTTOM w0.6: TP3.1 295.65,146.6 J26.1
  BOTTOM w2.5: JR1.2 290,98.6 288.9,99.7 288.9,123.9 292.1,127.1 292.1,136.1 289.4,138.8 J25.1 284.1,138.8 J25.2
24V_OUT: length 64.3
  TOP w0.962: J25.4 288.73,134.93 ; J25.4 286.47,132.67 ; J25.4 286.47,134.93 ; J25.4 288.73,132.67 ; Z4.1 292,128.16 ; Z4.1 292,124.84 ; Z4.1 293.61,126.5 ; Z4.1 290.39,126.5 ; F4.1 285.13,126.87 ; F4.1 282.87,126.87 ; F4.1 282.87,129.13 ; F4.1 285.13,129.13 ; 283.73,131.17 J25.3 283.73,133.43
  TOP w2: J25.3 282.6,134.19 280.29,136.5 280.29,136.51 279.5,137.3 279.5,143.5 282.07,146.07 CN16.2
  BOTTOM w0.962: 282.87,126.87 F4.1 ; F4.1 282.87,129.13 ; F4.1 285.13,126.87 ; F4.1 285.13,129.13 ; J25.4 288.73,132.67 ; J25.4 288.73,134.93 ; J25.4 286.47,134.93 ; J25.4 286.47,132.67 ; 281.47,131.17 J25.3 ; J25.3 283.73,133.43 ; J25.3 281.47,133.43 ; J25.3 283.73,131.17 ; 275.87,129.18 F3.1 ; F3.1 275.87,126.92 ; F3.1 278.13,126.92 ; F3.1 278.13,129.18
+5V: length 618.3
  TOP w0.29: U15.15 242.15,130.5 244.15,128.5 BC14.1 ; U12.15 185,107.3 187,109.3 BC11.1 ; BC13.1 270.5,128.5 268.5,130.5 U14.15
  TOP w0.3: BC4.1 210.03,83.77 U2.80 ; BC12.1 186.9,83.59 186.9,83.1 185,81.2 U13.15 ; BC13.1 272.2,130 R66.2 ; U16.15 216,130.1 217.5,128.6 218.6,128.6 BC15.1 ; v1(264,99.8) 268.4,99.8 272.1,96.1 278.7,96.1 279,95.8 279,93.7 279.7,93 R10.2 ; U2.61 202.43,95.9 BC3.1 ; BC1.1 224.62,92.5 223.72,93.4 U2.10 ; v1(216.3,90.1) 216.3,97.3 217.53,98.53 U2.31 ; v1(220.5,86.1) 220.03,86.57 U2.100
  TOP w0.4: R61.2 185.5,111.19 BC11.1 ; BC12.1 185.5,85.19 R63.2
  TOP w0.6: v2(218.7,127.7) C49.1 ; v2(229.5,122.5) 229.5,131.5 230.5,132.5 R75.2 ; v2(254.7,122.5) 254.7,130.5 256.7,132.5 R68.2 ; v2(204.5,122.9) 204.3,123.1 204.3,131.5 205.3,132.5 R82.2 ; R79.2 v2(221.2,130) ; R72.2 v2(247.2,130) ; v3(211.9,122.5) 212.4,123 R85.2 R84.1 ; R52.2 183,70.2 183.9,69.3 191.3,69.3 192.3,70.3 192.3,78 ; v2(244.7,127.7) C45.1
  TOP w0.8: 192.3,95.7 v3(192.3,95.71) ; 192.3,95.7 192.3,83.7 ; 192.3,95.7 192.3,95.9 ; 192.3,83.7 192.29,83.69 C36.1 BC12.1 ; 192.3,83.7 192.3,80.99 ; BC4.1 210.3,82.5 209.7,81.9 R13.2 v3(208.3,80.5) ; 240.27,121.3 J1.2 241.06,108.74 242.3,107.5 242.3,101 v1(241.3,100) 237.9,96.6 237.9,84.35 240.9,81.35 L4.2 245.9,80.95 C14.1 ; 240.27,121.3 240.3,121.33 v3(240.3,122.5) ; 240.27,121.3 240.27,124.97 R77.1 R86.2 ; 192.3,106.9 R49.1 ; 192.3,106.9 192.3,103.5 ; 192.3,106.9 192.3,109.8 ; R53.1 229.2,98 228.4,98.8 228.4,101.57 R9.2 229.63,104.43 230.3,105.1 233.43,105.1 D6.2 v3(233.7,110.9) ; 192.3,95.9 183.42,95.9 183,96.33 R50.2 ; 192.3,95.9 192.3,103.5 ; R8.2 266,64.6 264.9,65.7 258.2,65.7 258,65.9 ; v3(199.5,80.5) 198.89,81.11 C31.1 197.99,80.99 192.3,80.99 ; 192.3,109.8 v2(192.3,111) 192.3,111.1 186,117.4 175.3,117.4 171.8,120.9 171.8,138.4 179.2,145.8 188.9,145.8 189.96,144.74 EXP1.10 ; 192.3,109.8 192.19,109.69 C34.1 BC11.1 ; 258,65.9 R2.2 ; 258,65.9 258,74.8 v3(257.9,74.9) ; 268.3,122.7 R70.1 ; 268.3,122.7 268.5,122.5 269.9,122.5 270.7,123.3 C41.1 BC13.1 ; 268.3,122.7 268.1,122.5 v3(265.1,122.5) R55.2 ; 192.3,80.99 R58.1 ; 192.3,80.99 192.3,78 R87.2 ; v3(244.7,122.5) C45.1 BC14.1 ; BC15.1 C49.1 v3(218.7,122.5) ; 192.3,103.5 192.1,103.7 R54.2 ; BC1.1 v3(225.33,90.73) ; BC3.1 v3(201.1,95.7)
  TOP w0.962: 245.5,79.32 L4.2 245.5,83.38
  TOP w1: L4.2 246.95,81.35 251.9,86.3 U11.4
  BOTTOM w0.2: EXP1.10 189.96,147.84 TP48.1
  BOTTOM w0.3: 225.33,90.43 225,90.1 v1(216.3,90.1) ; v1(220.5,86.1) 225.13,86.1 225.33,86.3 ; v1(264,99.8) 241.5,99.8 v1(241.3,100)
  BOTTOM w0.6: v2(244.7,127.7) 245.3,127.7 247.2,129.6 v2(247.2,130) ; v2(218.7,127.7) 218.7,128.2 220.5,130 v2(221.2,130) ; TP2.1 246,75.7
  BOTTOM w0.8: v3(257.9,74.9) 257.1,75.7 244.5,75.7 v3(243.7,74.9) 235.2,74.9 229.6,80.5 225.7,80.5 ; v3(225.33,90.73) 225.33,80.87 225.7,80.5 ; J1.2 240.27,109.73 239.1,110.9 v3(233.7,110.9) ; 225.7,80.5 v3(208.3,80.5) v3(199.5,80.5) ; v3(192.3,95.71) 201.09,95.71 v3(201.1,95.7) ; v3(218.7,122.5) 217.7,122.5 ; 217.7,122.5 v2(229.5,122.5) v3(240.3,122.5) v3(244.7,122.5) v2(254.7,122.5) v3(265.1,122.5) ; 217.7,122.5 v3(211.9,122.5) 204.9,122.5 v2(204.5,122.9)
GND: length 800.5
  TOP w0.2: v2(176.1,76) 176.2,75.9 177.1,75.9 C61.2
  TOP w0.29: U13.3 183,77.99 v1(183.5,78.49) v1(183.5,79.49) U13.18 ; v1(183.5,105.49) U12.18 ; U15.18 v1(240.5,132) ; U12.3 183,103.99 v1(183.5,104.49) ; U15.3 239,132.5 v1(239.5,132) ; U16.18 v1(214.5,132) v1(213.5,132) 213,132.5 U16.3
  TOP w0.3: 210.81,88.89 210.53,88.61 U2.81 210.53,84.87 BC4.2 ; 220.63,84.1 220.63,84.53 v1(220.7,84.6) ; 220.63,84.1 220.4,84.1 219.53,84.97 U2.99 v1(219.53,91.35) ; 220.63,84.1 BC2.2 ; U1.25 277.75,100.75 U1.2 ; C1.2 218.9,107.74 218.9,106.1 217.03,104.23 U2.32 217.03,101.43 v2(216.5,100.9) ; U2.62 203.53,95.4 BC3.2 ; BC1.2 225.13,93.9 U2.11 ; U14.18 v1(266.5,132) ; v1(265.5,132) 265,132.5 U14.3
  TOP w0.6: BC3.2 v2(202.23,86.57) ; C7.2 v2(229.63,100.17) ; BC2.2 220.7,83.74 v2(220.7,82.5) ; R59.1 178.83,70.42 C59.2 178.81,69.01 178.7,68.9 ; R59.1 181,68.9 180.9,68.8 ; R59.1 181.48,70.42 182.2,69.7 ; C2.2 v2(213.88,109.08) ; C15.2 v2(278,108.8) ; C15.2 C21.2 C19.2 ; C15.2 C9.2 v2(276.3,108.9) ; R56.1 v3(191.31,79.49) ; C68.2 v2(263.7,139.5) ; 179,94.8 178.81,94.99 C63.2 180.99,96.43 R51.1 ; v2(215.3,94.1) 215.3,98.9 216.5,100.1 v2(216.5,100.9) ; v2(216.4,140) C55.2 ; v2(222.1,140) 222.1,134.53 R78.1 ; v2(242.4,139.7) C58.2 ; C34.2 BC11.2 187,112.3 187.2,112.5 ; 180.85,87.2 v2(176.1,87.2) ; 180.85,87.2 R57.1 ; 180.85,87.2 180.95,87.2 181,87.25 ; C31.2 v2(196.31,86.51) ; C31.2 v2(198.11,88.89) ; C31.2 v2(199.69,86.51) ; v3(182.2,87.1) 183.6,87.1 184,86.7 R62.1 ; BC12.2 C36.2 188.71,85.5 v2(188.71,88.89) ; 182.3,95.3 181.18,96.42 R51.1 ; R47.1 v2(191.1,105.3) ; v2(240.3,92.9) 241.24,93.84 D3.1 ; C1.2 218.72,107.92 v2(218.72,109.08) ; v2(176.1,113.2) 180.95,113.2 R48.1 ; v2(226.3,94) 226.2,94.1 225.34,94.1 BC1.2 ; C61.2 v2(176.1,76) ; BC14.2 247.6,128.5 ; v3(191.31,76.41) 190.39,76.41 C40.2 ; 211.9,78.1 v2(211.9,82.5) BC4.2 v2(211.9,84.3) ; C60.2 176.3,81.7 v2(176.1,81.7) ; R51.1 181,95 180.9,94.9 ; R71.1 248.1,134.63 v2(248.1,139.7) ; C54.2 v2(211.8,140) ; R74.1 229.9,134.5 ; BC13.2 C41.2 ; v2(268.3,139.5) C69.2 ; C64.2 v2(176.1,102) ; R30.2 v2(228.8,94) ; v2(263.5,123.9) C44.2 ; v2(221.4,128.5) BC15.2 ; C57.2 v2(237.8,139.7) ; v2(176.1,107.7) 176.3,107.7 C65.2 ; R65.1 272.3,131.6 272.9,132.2 272.9,133.33 R64.1 273,133.43 v2(273,139.5) ; R69.1 v2(266.7,123.9) ; J1.6 240.3,103.63 240.3,101.9 236.59,98.19 LED1.2 ; v2(278.5,113.5) D4.1 ; R80.1 v2(221.4,131.5)
  TOP w0.8: R36.1 277.37,79.06 Q3.3 ; R36.1 278.63,79.06 Q3.2 ; R36.1 R39.1 279.9,79.6 Q3.1 ; Q5.3 289.37,79.06 R42.1 ; R42.1 290.63,79.06 Q5.2 ; R42.1 R43.1 291.9,79.6 Q5.1
  TOP w0.962: 254.26,56.51 CN2.2 ; CN2.2 256.24,58.49 ; CN2.2 254.26,58.49 ; CN2.2 256.24,56.51 ; 273.23,127 C41.2 272.3,126.02 ; 247.97,133.27 R71.1 ; R71.1 247.97,135.73 ; R71.1 249.14,134.5 ; 255.17,107.2 C29.2 ; C29.2 257.83,107.2 ; C29.2 256.5,109.48 ; 269.31,113.5 D2.1 ; D2.1 272.17,113.5 ; D2.1 270.74,111.97 ; D2.1 270.74,115.03 ; U11.6 264.77,93.78 ; U11.6 269.55,88 ; U11.6 264.77,82.22 ; BC6.2 261.23,95.7 ; BC6.2 260.3,96.68 ; BC6.2 260.3,94.72 ; 257.43,135.96 C67.2 256.26,137.19 ; 205.43,135.73 R81.1 204.26,134.5 ; 233.76,58.99 CN12.2 ; CN12.2 233.76,57.01 ; CN12.2 235.74,58.99 ; CN12.2 235.74,57.01 ; 165.63,149.87 PAD6.1 ; PAD6.1 170.37,149.87 ; PAD6.1 165.63,145.13 ; PAD6.1 170.37,145.13 ; 252.8,141.17 C70.2 ; C70.2 252.8,143.83 ; C70.2 250.52,142.5 ; 280,78.77 R39.1 280.98,79.7 ; R78.1 223.24,134.5 ; R78.1 222.07,135.73 ; R78.1 222.07,133.27 ; 230.26,136.69 C56.2 231.43,137.91 ; 292.98,79.7 R43.1 292,78.77 ; C11.2 223.73,67.6 ; C11.2 222.8,68.58 ; C11.2 222.8,66.62 ; 257.43,135.73 R67.1 256.26,134.5 ; PAD8.1 170.37,55.13 ; PAD8.1 170.37,59.87 ; PAD8.1 165.63,55.13 ; PAD8.1 165.63,59.87 ; 183.02,111.29 R60.1 184,112.22 ; 191.23,76.5 C40.2 190.3,75.52 ; EXP1.1 181.23,142.68 ; EXP1.1 181.23,139.83 ; EXP1.1 178.37,139.83 ; EXP1.1 178.37,142.68 ; J27.2 202.28,56.45 ; J27.2 200.18,58.55 ; J27.2 202.28,58.55 ; J27.2 200.18,56.45 ; 239.21,102.6 J1.6 239.21,104.72 ; R48.1 182.23,113.25 ; R48.1 181,114.43 ; R48.1 179.77,113.25 ; 220.3,126.02 C49.2 221.23,127 ; 216.38,125.2 R83.1 215.4,124.27 ; 246.3,126.02 C45.2 247.23,127 ; 274.14,133.4 R64.1 272.97,134.63 ; 210.9,124.27 C52.2 209.92,125.2 ; 247.23,131.5 R73.1 246.3,132.48 ; D9.1 213.24,64.53 ; D9.1 213.24,61.47 ; D9.1 214.67,63 ; D9.1 211.81,63 ; 188.5,112.22 C34.2 189.48,111.29 ; 255.02,62.7 C3.2 256,61.77 ; 209.4,67.47 C8.2 ; C8.2 208.42,68.4 ; C8.2 210.38,68.4 ; 292.26,145.51 J26.2 ; J26.2 292.26,147.49 ; J26.2 294.24,145.51 ; C1.2 218.73,108.88 ; C1.2 218.73,106.93 ; C1.2 219.66,107.9 ; D4.1 279.74,115.03 ; D4.1 279.74,111.97 ; D4.1 281.17,113.5 ; C66.2 174.83,92.8 ; C66.2 172.17,92.8 ; C66.2 173.5,90.52 ; 224.52,143 C32.2 ; C32.2 226.8,141.67 ; C32.2 226.8,144.33 ; 173.26,123.06 EXP2.1 ; EXP2.1 176.12,125.91 ; EXP2.1 173.26,125.91 ; EXP2.1 176.12,123.06 ; 263.02,62.7 C6.2 264,61.77 ; CN11.2 243.24,58.99 ; CN11.2 243.24,57.01 ; CN11.2 241.26,58.99 ; CN11.2 241.26,57.01 ; C13.2 248.5,109.48 ; C13.2 247.17,107.2 ; C13.2 249.83,107.2 ; 188.9,142.32 EXP1.9 ; EXP1.9 191.02,142.32 ; EXP1.9 188.9,140.2 ; EXP1.9 191.02,140.2 ; 217.02,70 U17.2 220.28,70 ; D3.1 242.67,96.5 ; D3.1 239.81,96.5 ; D3.1 241.24,98.03 ; CN18.2 215.24,58.49 ; CN18.2 213.26,58.49 ; CN18.2 215.24,56.51 ; CN18.2 213.26,56.51 ; 203.21,94.1 BC3.2 201.25,94.1 ; C14.2 252.1,76.43 ; C14.2 253.53,74.5 ; C14.2 252.1,72.57 ; C14.2 250.67,74.5 ; 262.76,56.51 CN6.2 ; CN6.2 262.76,58.49 ; CN6.2 264.74,58.49 ; CN6.2 264.74,56.51 ; C10.2 272.5,103.73 ; C10.2 273.48,102.8 ; C10.2 271.52,102.8 ; 242.98,125.2 R76.1 242,124.27 ; 294.92,94.28 JR1.1 ; JR1.1 297.88,94.28 ; JR1.1 294.92,91.32 ; 200.8,141.17 C28.2 ; C28.2 203.08,142.5 ; C28.2 200.8,143.83 ; C28.2 198.52,142.5 ; 204.26,137.19 C53.2 205.43,135.96 ; R57.1 182.23,87.35 ; R57.1 181,88.53 ; R57.1 179.77,87.35 ; 281,108.63 C19.2 281.98,107.7 ; 279.79,95.98 LED2.2 280.72,95 ; CN13.2 228.24,57.01 ; CN13.2 228.24,58.99 ; CN13.2 226.26,57.01 ; CN13.2 226.26,58.99 ; 293.7,121.47 L1.2 292.77,122.5 ; 172.17,66.8 C62.2 ; C62.2 173.5,64.52 ; C62.2 174.83,66.8 ; 236.52,125.2 C48.2 237.5,124.27 ; 212.95,107.9 C2.2 213.88,106.93 ; 189.48,85.29 C36.2 188.5,86.22 ; 191.23,102.1 C38.2 190.3,101.12
  TOP w1: 241.5,88.1 241.6,88 v3(244.1,88) v3(246.1,88) v3(248.1,88) U11.3 U11.6 261.37,84.6 U11.5 ; U7.4 298.05,115.15 298.5,115.6 298.5,116.9 297.6,117.8
  TOP w2: 294.1,92.7 294.2,92.8 JR1.1 299.6,92.8 JR1.3
  BOTTOM w0.6: v2(211.8,140) v2(216.4,140) v2(222.1,140) ; v2(199.69,86.51) 203.3,86.51 203.24,86.57 v2(202.23,86.57) ; v2(276.3,108.9) 276.3,102.7 276.1,102.5 v2(276.1,102.4) ; v3(182.2,87.1) 186.92,87.1 v2(188.71,88.89) v2(198.11,88.89) ; v3(191.31,79.49) v3(191.31,76.41) ; v2(278.5,113.5) 278,113 v2(278,108.8) ; v2(229.63,100.17) 222.83,100.17 220.1,102.9 217.1,102.9 216.5,102.3 v2(216.5,100.9) ; v2(176.1,87.2) v2(176.1,81.7) v2(176.1,76) ; v2(213.88,109.08) v2(218.72,109.08) ; v2(176.1,102) v2(176.1,107.7) v2(176.1,113.2) ; v2(266.7,123.9) v2(263.5,123.9) ; v2(273,139.5) v2(268.3,139.5) v2(263.7,139.5) ; v2(248.1,139.7) v2(242.4,139.7) v2(237.8,139.7) ; v2(215.3,94.1) 215.5,93.9 226.2,93.9 v2(226.3,94) v2(228.8,94) ; v2(211.9,82.5) v2(220.7,82.5)
  BOTTOM w0.962: 165.63,59.87 PAD8.1 ; PAD8.1 170.37,55.13 ; PAD8.1 170.37,59.87 ; PAD8.1 165.63,55.13 ; 179.82,135.66 TP43.1 ; TP43.1 179.82,138.72 ; TP43.1 178.3,137.19 ; J1.6 241.33,102.6 ; J1.6 239.21,102.6 ; J1.6 241.33,104.72 ; 241.26,58.99 CN11.2 ; CN11.2 241.26,57.01 ; CN11.2 243.24,57.01 ; CN11.2 243.24,58.99 ; 292.26,147.49 J26.2 ; J26.2 294.24,145.51 ; J26.2 294.24,147.49 ; J26.2 292.26,145.51 ; 294.92,91.32 JR1.1 294.92,94.28 ; CN13.2 228.24,57.01 ; CN13.2 226.26,58.99 ; CN13.2 226.26,57.01 ; CN13.2 228.24,58.99 ; CN2.2 256.24,56.51 ; CN2.2 254.26,58.49 ; CN2.2 256.24,58.49 ; CN2.2 254.26,56.51 ; 191.51,137.19 TP39.1 189.98,138.72 ; 165.63,149.87 PAD6.1 ; PAD6.1 170.37,149.87 ; PAD6.1 165.63,145.13 ; PAD6.1 170.37,145.13 ; 233.76,57.01 CN12.2 ; CN12.2 235.74,58.99 ; CN12.2 235.74,57.01 ; CN12.2 233.76,58.99 ; EXP1.1 181.23,139.83 ; EXP1.1 178.37,142.68 ; EXP1.1 181.23,142.68 ; EXP1.1 178.37,139.83 ; CN18.2 215.24,58.49 ; CN18.2 213.26,56.51 ; CN18.2 215.24,56.51 ; CN18.2 213.26,58.49 ; EXP1.9 191.02,140.2 ; EXP1.9 191.02,142.32 ; EXP1.9 188.9,142.32 ; EXP1.9 188.9,140.2 ; 173.26,123.06 EXP2.1 ; EXP2.1 176.12,125.91 ; EXP2.1 173.26,125.91 ; EXP2.1 176.12,123.06 ; 293.11,148.83 TP64.1 ; TP64.1 293.11,151.89 ; TP64.1 291.58,150.36 ; 213.16,62.14 TP34.1 ; TP34.1 214.69,60.61 ; TP34.1 214.69,63.66 ; TP38.1 294.13,117.85 ; TP38.1 291.07,117.85 ; TP38.1 292.6,119.38 ; TP63.1 201.16,63.5 ; TP63.1 199.63,61.97 ; TP63.1 201.16,60.44 ; 173.22,120.46 TP61.1 ; TP61.1 174.74,121.99 ; TP61.1 174.74,118.93 ; CN6.2 264.74,56.51 ; CN6.2 262.76,56.51 ; CN6.2 264.74,58.49 ; CN6.2 262.76,58.49 ; J27.2 202.28,58.55 ; J27.2 202.28,56.45 ; J27.2 200.18,58.55 ; J27.2 200.18,56.45
  BOTTOM w1: TP38.1 292.65,117.9 297.5,117.9 297.9,117.5 U7.4
  BOTTOM w2: JR1.3 296.8,93.2 JR1.1
  vias: v1(182.5,105.49) v1(182.5,104.49) v1(182.5,103.49) v1(182.5,79.49) v1(182.5,78.49) v1(182.5,77.49) v1(183.5,103.49) v1(183.5,77.49) v1(184.5,105.49) v1(184.5,104.49) v1(184.5,103.49) v1(184.5,79.49) v1(184.5,78.49) v1(184.5,77.49) v1(212.5,133) v1(212.5,132) v1(212.5,131) v1(213.5,133) v1(213.5,131) v1(214.5,133) v1(214.5,131) v1(238.5,133) v1(238.5,132) v1(238.5,131) v1(239.5,133) v1(239.5,131) v1(240.5,133) v1(240.5,131) v1(264.5,133) v1(264.5,132) v1(264.5,131) v1(265.5,133) v1(265.5,131) v1(266.5,133) v1(266.5,131) v2(169.6,117.6) v2(169.7,135.6) v2(169.8,131.9) v2(171.6,93.8) v2(171.6,92.5) v2(171.6,91.2) v2(171.6,68) v2(171.6,66.7) v2(171.6,65.4) v2(171.9,117.6) v2(175.2,135.1) v2(175.4,93.9) v2(175.4,92.5) v2(175.4,91.3) v2(175.4,68.1) v2(175.4,66.7) v2(175.4,65.5) v2(177.7,135) v2(178.9,94.6) v2(181,94.7) v2(182.5,92.1) v2(183.2,64.5) v2(183.4,59.4) v2(184.1,113.8) v2(186,92.1) v2(187.2,74.5) v2(188.1,113.2) v2(188.1,59.4) v2(188.2,64.5) v2(188.9,92.2) v2(189.1,99.2) v2(190.3,74.5) v2(190.8,99.3) v2(192.9,64.5) v2(193,112.4) v2(193.1,59.4) v2(195.1,101.4) v2(195.1,99.1) v2(195.3,108.3) v2(195.3,93) v2(195.4,90.4) v2(198.8,103.2) v2(199.4,144.3) v2(199.5,140.5) v2(200.8,144.3) v2(200.8,140.5) v2(201,100.8) v2(202,144.3) v2(202.1,140.5) v2(202.2,92.5) v2(205.2,78.1) v2(205.2,76) v2(205.7,83.5) v2(206.3,86.9) v2(209.7,76) v2(209.8,66) v2(209.8,61.7) v2(212,97) v2(212,93.8) v2(212,90.4) v2(212.7,116) v2(212.7,75.9) v2(215.1,75.9) v2(217.1,116) v2(220.8,106.5) v2(220.9,109) v2(221.1,103.8) v2(221.3,115.9) v2(222,62.9) v2(222.1,60.2) v2(222.2,57.2) v2(223.5,84.3) v2(223.5,82.2) v2(223.7,87.4) v2(223.8,77.5) v2(223.9,75) v2(225.4,144.8) v2(225.5,141) v2(226.8,144.8) v2(226.8,141) v2(227.3,131) v2(227.3,127.7) v2(228,144.8) v2(228.1,141) v2(228.6,120.8) v2(229.6,136.6) v2(229.6,134.4) v2(230.3,118.4) v2(230.3,84.2) v2(230.3,82.9) v2(230.3,81.6) v2(233.9,127.4) v2(234.1,84.3) v2(234.1,82.9) v2(234.1,81.7) v2(235.8,127.4) v2(236.1,125.1) v2(237.5,124.1) v2(237.8,120.3) v2(237.8,116.3) v2(237.8,113.2) v2(238.2,72.8) v2(240.4,91.4) v2(240.4,89.3) v2(240.4,87) v2(242.6,120.5) v2(242.6,116.5) v2(242.6,112.5) v2(243,97.2) v2(243.4,125.2) v2(244.4,101.3) v2(246.3,132.9) v2(246.7,108.5) v2(246.7,107.2) v2(246.7,105.9) v2(247,125) v2(247.9,132.9) v2(248,136.5) v2(248.6,125) v2(249.1,117.8) v2(249.1,116.5) v2(249.1,115.2) v2(249.5,134.5) v2(250.1,63.3) v2(250.1,59.7) v2(250.2,56) v2(250.5,108.6) v2(250.5,107.2) v2(250.5,106) v2(251.4,144.3) v2(251.5,140.5) v2(252.2,77.5) v2(252.3,136.8) v2(252.4,131.8) v2(252.4,126.8) v2(252.8,144.3) v2(252.8,140.5) v2(252.9,117.9) v2(252.9,116.5) v2(252.9,115.3) v2(254,144.3) v2(254.1,140.5) v2(254.4,62.7) v2(254.6,73.9) v2(254.7,108.4) v2(254.7,107.1) v2(254.7,105.8) v2(254.9,77.5) v2(255.4,137.2) v2(255.5,134.5) v2(256,61) v2(256.3,72.7) v2(256.7,117.8) v2(256.7,116.5) v2(256.7,115.2) v2(257.5,135.8) v2(258.5,108.5) v2(258.5,107.1) v2(258.5,105.9) v2(258.9,125.1) v2(260.5,117.9) v2(260.5,116.5) v2(260.5,115.3) v2(261.2,125) v2(261.3,74.9) v2(261.3,73.6) v2(261.3,72.3) v2(262.1,62.6) v2(262.4,97.1) v2(264,61) v2(265.1,75) v2(265.1,73.6) v2(265.1,72.4) v2(268,97.5) v2(268.3,74.9) v2(268.3,73.6) v2(268.3,72.3) v2(270.7,111) v2(270.8,115.6) v2(271.4,63.5) v2(271.4,59.9) v2(271.5,56.2) v2(272.1,75) v2(272.1,73.6) v2(272.1,72.4) v2(272.4,122.7) v2(272.5,120.2) v2(272.5,107.9) v2(272.5,104.6) v2(272.5,99.4) v2(272.6,113.5) v2(273.6,128.4) v2(274,89.4) v2(274,88.1) v2(274,86.8) v2(276.2,100.6) v2(277,101.6) v2(277.8,102.4) v2(277.8,100.6) v2(277.8,89.5) v2(277.8,88.1) v2(277.8,86.9) v2(279.1,111.5) v2(279.5,150.6) v2(279.5,148.1) v2(281.1,117.6) v2(284.8,77.7) v2(284.8,74.1) v2(284.9,70.4) v2(285.4,64.5) v2(285.4,60.9) v2(285.5,57.2) v2(288.1,148.4) v2(288.1,144.8) v2(288.2,141.1) v2(288.4,93.4) v2(288.4,89.8) v2(288.5,86.1) v2(290.7,148.4) v2(290.7,144.8) v2(290.8,141.1) v2(291.1,93.3) v2(291.1,89.7) v2(291.2,86) v2(291.9,122.4) v2(291.9,120.7) v2(293.5,79.6) v2(293.7,120.7) v2(295.4,118.9) v2(295.5,116.8) v2(296.1,81.8) v2(296.1,78.2) v2(296.2,74.5) v2(297.3,116.9) v2(297.4,118.9) v2(297.79,151.11) v2(297.79,145.01) v3(261.5,92.3) v3(261.5,88.1) v3(261.5,84) v3(264.5,92.3) v3(264.5,88.1) v3(264.5,84) v3(267.5,92.3) v3(267.5,88.1) v3(267.5,84)
VBUS: length 37.7
  TOP w0.3: U1.8 277.75,105.85 C15.1 278.25,105.85 U1.7
  TOP w0.6: C15.1 C9.1 275.63,106.1 275.1,106.63 275.1,109.5 275.5,109.9 289.7,109.9 294.95,115.15 U7.1
  BOTTOM w0.8: U7.1 292.76,115.15 TP35.1
VDD3V3: length 10.3
  TOP w0.3: C21.1 279.5,103.15 U1.6 ; U1.5 280.25,102.25 281,103 C19.1
  TOP w0.6: C21.1 C19.1
VIN_HB: length 89.6
  TOP w0.962: 282.87,121.63 F2.2 ; F2.2 285.13,121.63 ; F2.2 282.87,119.37 ; F2.2 285.13,119.37 ; 282.87,119.13 F4.2 ; F4.2 282.87,116.87 ; F4.2 285.13,119.13
  TOP w2: D4.2 284.26,117.74 F4.2 F2.2 ; CN19.1 292.76,59.51 D12.2
  BOTTOM w2.5: CN19.1 292.25,62.99 TP32.1 292.41,74.99 285.1,82.3 285.1,116.9 F4.2
1A_1: length 5.5
  TOP w0.3: 179.2,105 179.21,104.99 U12.24
  BOTTOM w0.5: CN3.2 169.62,107.62 TP6.1
1A_2: length 5.4
  TOP w0.3: 179.21,78.99 U13.24
  BOTTOM w0.5: TP22.1 169.53,81.21 CN4.2
1A_3: length 11
  TOP w0.3: U14.24 266,136 266.3,136.3
  TOP w0.8: CN7.2 267.75,142.75 266.3,141.3
  BOTTOM w0.6: TP10.1 267.68,145.93 CN7.2
1A_4: length 13.5
  TOP w0.2: 240,135.6 240.68,136.28
  TOP w0.3: U15.24 240,135.62 ; 240.6,136.5 240,135.9 240,135.62 ; 240.9,136.5 240.68,136.28 240.66,136.28 240,135.62
  TOP w0.8: 240.3,141.3 241.75,142.75 CN8.2
  BOTTOM w0.6: CN8.2 241.77,145.98 TP18.1
1A_5: length 11.2
  TOP w0.3: U16.24 214,136 214.8,136.8
  TOP w0.8: 214.3,141.3 215.75,142.75 CN9.2
  BOTTOM w0.6: TP14.1 215.86,145.89 CN9.2
1B_1: length 6.4
  TOP w0.3: U12.21 182,108 180.8,109.2
  BOTTOM w0.5: CN3.1 169.58,110.16 TP7.1
1B_2: length 5.4
  TOP w0.3: U13.21 182,82.3 181.7,82.6
  BOTTOM w0.5: TP23.1 169.51,83.75 CN4.1
1B_3: length 6.3
  TOP w0.2: U14.21 268.7,133.5 270,134.8
  BOTTOM w0.6: CN7.1 270.22,145.97 TP11.1
1B_4: length 7.4
  TOP w0.3: U15.21 242.6,133.5 244.7,135.6
  BOTTOM w0.6: CN8.1 244.31,145.94 TP19.1
1B_5: length 17.1
  TOP w0.3: U16.21 216.6,133.5 218.8,135.7
  TOP w0.8: 218.15,136.05 218.25,136.05 CN9.1
  BOTTOM w0.6: CN9.1 218.4,145.85 TP15.1
2A_1: length 5.7
  TOP w0.3: U12.26 179.01,103.99 179,104
  BOTTOM w0.5: CN3.3 169.66,105.08 TP5.1
2A_2: length 5.7
  TOP w0.3: 179.01,77.99 U13.26
  BOTTOM w0.5: TP21.1 169.57,78.67 CN4.3
2A_3: length 17
  TOP w0.3: 265,135.18 265.1,135.28 265.1,135.7 ; 265,135.18 265,136.61 265.1,136.71 ; 265,135.18 U14.26
  TOP w0.5: 265.1,136.71 265.1,135.7
  TOP w0.8: CN7.3 265.1,145.85 265.1,136.71
  BOTTOM w0.6: CN7.3 265.14,145.89 TP9.1
2A_4: length 15.4
  TOP w0.3: 239.1,135.7 239.1,135.28 239,135.18 U15.26
  TOP w0.5: 239.1,136.71 239.1,135.7
  TOP w0.8: CN8.3 239.1,145.85 239.1,136.71
  BOTTOM w0.6: CN8.3 239.23,145.98 TP17.1
2A_5: length 14.9
  TOP w0.3: U16.26 213,135.18 213.1,135.28 213.1,135.7
  TOP w0.5: 213.1,135.7 213.1,136.71
  TOP w0.8: CN9.3 213.1,145.85 213.1,136.71
  BOTTOM w0.6: TP13.1 213.32,145.93 CN9.3
2B_1: length 5.9
  TOP w0.2: 182,100.9 181.7,100.6
  TOP w0.3: 181.7,100.4 182,100.7 U12.1
  BOTTOM w0.5: CN3.4 169.7,102.54 TP4.1
2B_2: length 5.4
  TOP w0.3: U13.1 182,74.7 181.7,74.4
  BOTTOM w0.5: CN4.4 169.61,76.13 TP20.1
2B_3: length 17.1
  TOP w0.3: 262.4,133.8 262.7,133.5 U14.1
  TOP w0.5: 262.4,133.8 262.2,134
  TOP w0.8: CN7.4 262.2,145.45 262.2,134
  BOTTOM w0.6: TP8.1 262.6,145.85 CN7.4
2B_4: length 7.4
  TOP w0.2: U15.1 237.4,133.5 237.5,133.6 237.3,133.6 236.9,134 ; 236.7,133.5 236.3,133.5 236,133.8
  TOP w0.3: 236.4,133.8 236.7,133.5 U15.1
  TOP w0.8: CN8.4 236.2,145.45
  BOTTOM w0.6: CN8.4 236.69,145.94 TP16.1
2B_5: length 5.1
  TOP w0.3: 210.4,133.8 210.7,133.5 U16.1
  TOP w0.5: 210.2,134 210.4,133.8
  TOP w0.8: 210.2,145.45 CN9.4
  BOTTOM w0.6: CN9.4 210.78,145.97 TP12.1
AREF: length 3.1
  TOP w0.3: U2.98 BC2.1
BEEPER: length 47.7
  TOP w0.2: v1(203.6,116.7) 203.6,113.65 205.17,112.08 212.83,104.42 213.03,104.22 U2.40
  BOTTOM w0.2: v1(203.6,116.7) 182.5,116.7 179.82,119.38 TP56.1 179.77,120.52 EXP2.5
BTN_ENC: length 54.7
  TOP w0.2: U2.41 212.53,104.26 204.37,112.42 202.89,113.9 202.89,113.9 198.1,118.7 v1(198.1,129.7)
  BOTTOM w0.2: v1(198.1,129.7) 194.9,132.9 184.14,132.9 TP50.1 182.36,127.08 EXP2.8
CP_RXD: length 49.4
  TOP w0.2: U1.20 276.3,99.35 v1(276.3,97.9) ; v1(235.7,91.5) 235.1,90.9 R31.1
  BOTTOM w0.2: v1(276.3,97.9) 273.3,94.9 239.1,94.9 v1(235.7,91.5)
CP_TXD: length 51.2
  TOP w0.2: v1(236.3,90.7) 235,89.4 R32.1 ; v1(276.9,96.9) 276.9,98.35 276.75,98.5 U1.21
  BOTTOM w0.2: v1(276.9,96.9) 274.1,94.1 239.7,94.1 v1(236.3,90.7)
D+: length 9.1
  TOP w0.3: U1.3 283.25,101.25 285.9,103.9 R24.1
D-: length 9.8
  TOP w0.3: U1.4 282.75,101.75 286.5,105.5 286.5,105.57 286.83,105.9 R23.1
DTR: length 54.1
  TOP w0.2: v1(232.1,94.1) 231.4,94.1 R30.1 C12.1 R53.2 ; U1.23 277.75,98.25 v1(277.9,98.1)
  BOTTOM w0.2: v1(277.9,98.1) 277.4,98.6 275.2,98.6 272.5,95.9 239.1,95.9 237.3,94.1 v1(232.1,94.1)
E0-DIR: length 44.2
  TOP w0.2: U2.78 209.03,94.04 209.28,94.29 v1(209.28,98.7) ; v1(183,108.4) U12.19
  BOTTOM w0.2: v1(209.28,98.7) 208.48,99.5 200.7,99.5 191.1,109.1 183.6,109.1 183,108.5 v1(183,108.4)
E0-EN: length 39.2
  TOP w0.2: U2.76 v1(208.03,95.9) ; R50.1 182.9,98.89 v1(182.9,99.9) 182.5,100.3 U12.2
  BOTTOM w0.2: v1(208.03,95.9) 205.6,95.9 204.7,96.8 196,96.8 195.03,97.77 187.07,97.77 187.07,97.77 185.03,97.77 v1(182.9,99.9)
E0-STEP: length 41.2
  TOP w0.2: U2.77 208.53,94 208.83,94.3 208.83,97.98 208.5,98.31 v1(208.46,98.31) ; v1(184.7,108.3) 184.5,108.1 U12.16
  BOTTOM w0.2: v1(208.46,98.31) 208.46,98.34 208.13,98.67 200.73,98.67 190.9,108.5 184.9,108.5 v1(184.7,108.3)
E1-DIR: length 28.7
  TOP w0.2: v1(204.3,85.5) 204.3,87.9 205.3,88.9 U2.75 ; v1(183.1,82.7) 183,82.6 U13.19
  BOTTOM w0.2: v1(204.3,85.5) 185.9,85.5 v1(183.1,82.7)
E1-EN: length 40.2
  TOP w0.2: R52.1 183.1,72.89 v1(183.1,73.5) 182.5,74.1 U13.2 ; v1(203.15,76.7) 203.15,88.55 204.5,89.9 U2.73
  BOTTOM w0.2: v1(203.15,76.7) 198.8,76.7 195.6,73.5 v1(183.1,73.5)
E1-STEP: length 28.6
  TOP w0.2: v1(203.7,83.3) 203.7,88.3 204.8,89.4 U2.74 ; v1(185,82.5) 184.5,82 U13.16
  BOTTOM w0.2: v1(185,82.5) 185,82.6 185.7,83.3 v1(203.7,83.3)
FAN_1: length 18.4
  TOP w0.2: R17.2 221.5,87.5 220.5,88.5 220.5,92.4 219.4,93.5 219.4,95.3 220.5,96.4 U2.16
